# Altium PCB linkit-v4-0.3_6layers_smdonly.PcbDoc (part 5 of 5)
Units mil, origin at the board's own origin, x right, y up, seen from the top; angles counter-clockwise.
Board outline 2755.93 x 1377.98 mil, 6 copper layers (Top Layer, Int1 (GND), Int2 (Sign), Int3 (Sign), Int4 (PWR), Bottom Layer), stack 64.425 mil thick; 199 components, 156 nets, 686 pads, 678 vias.
Unrouted connection lines stored in the file: 1.
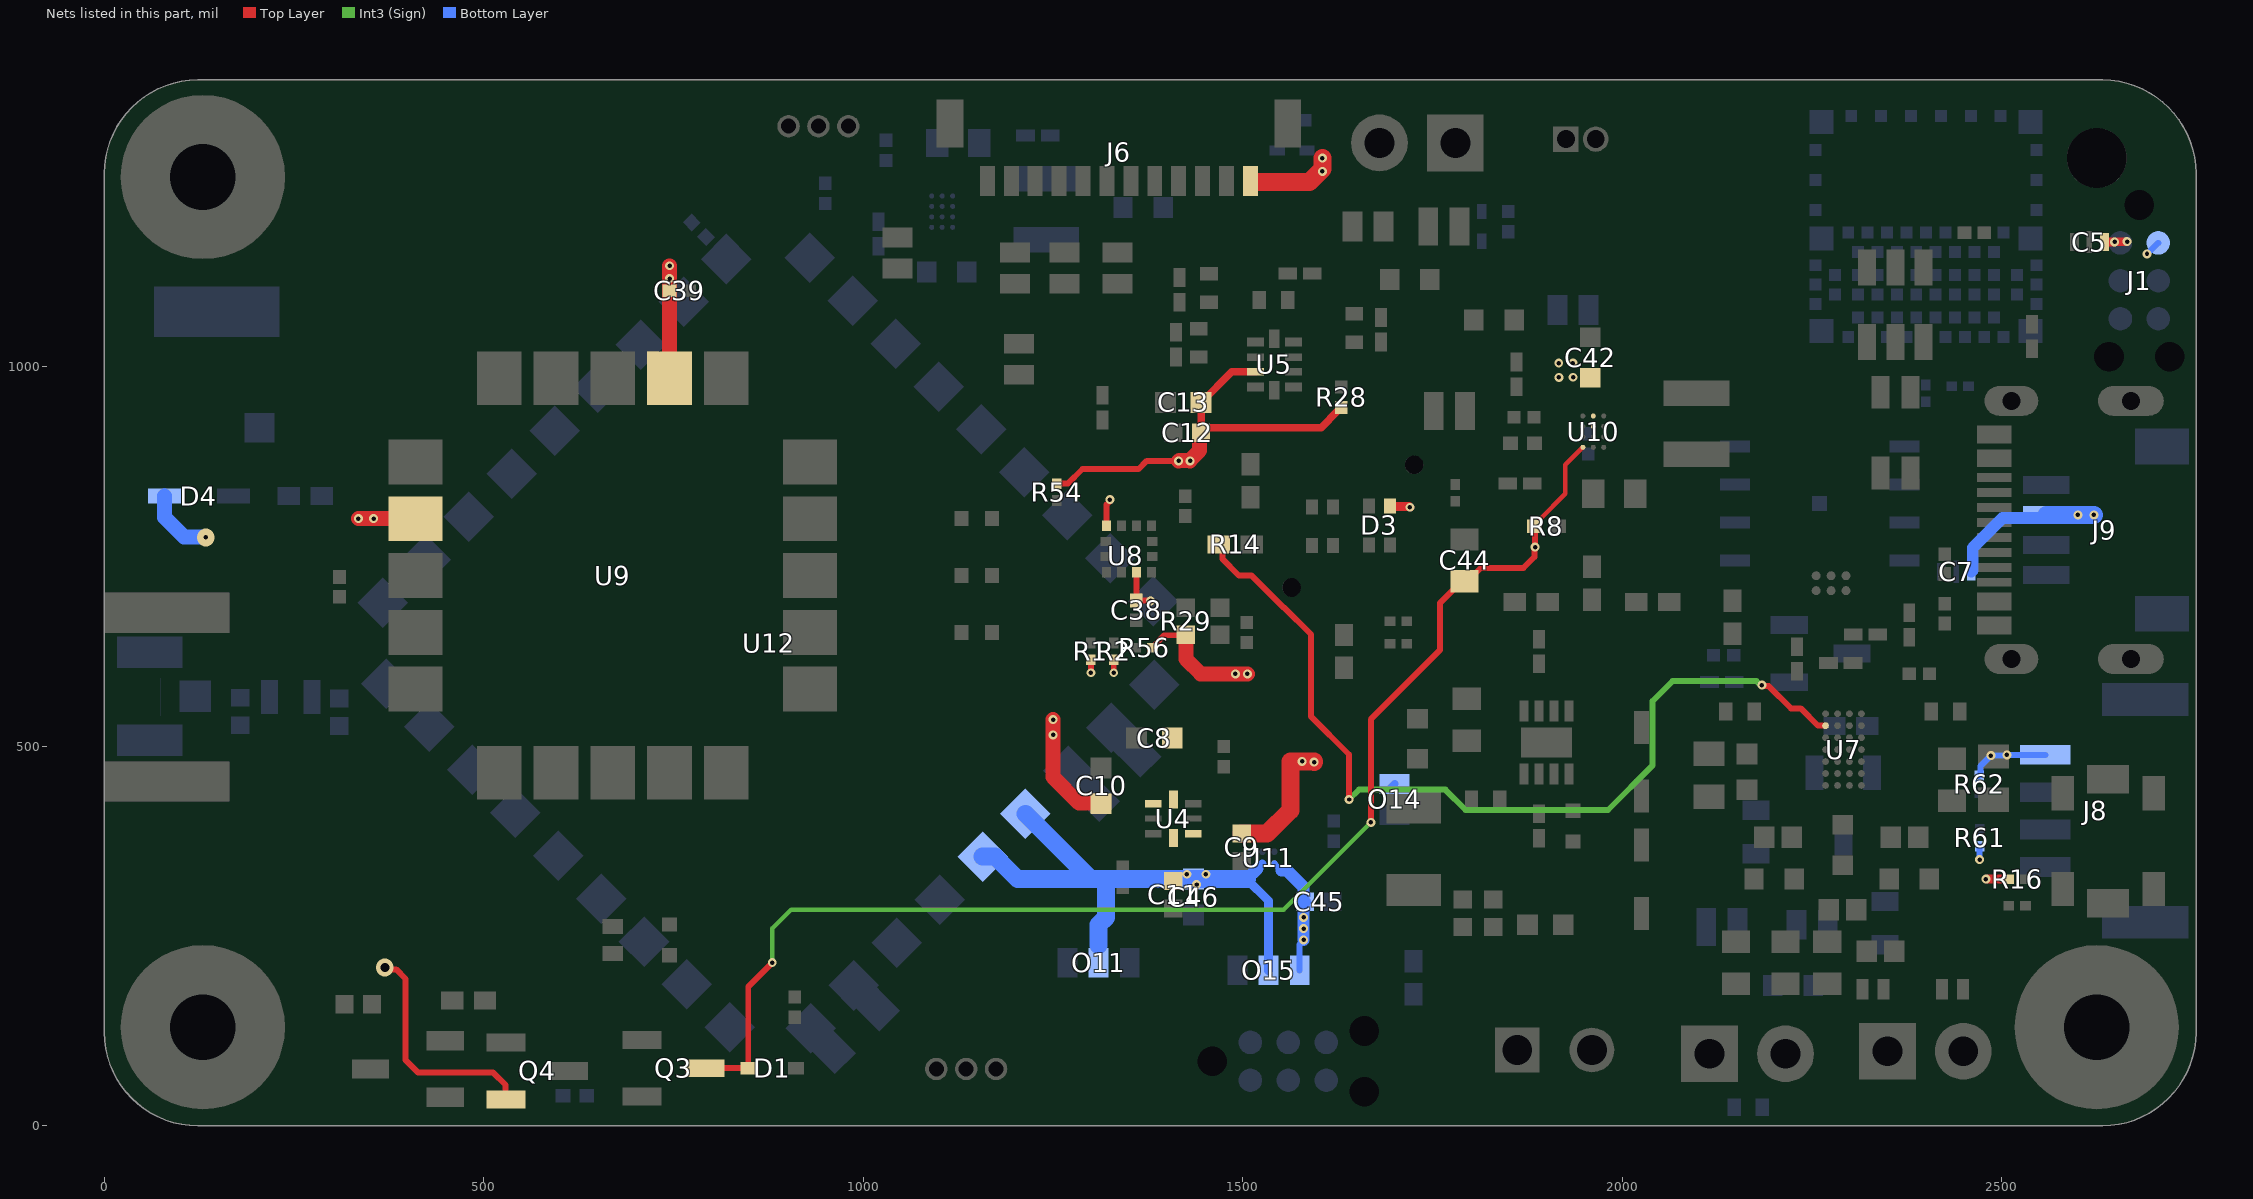
[diagram p8: the nets of this part, all layers, seen from the top]

## Via types
v1: diameter 11.81, hole 5.91, Int1 (GND) to Int3 (Sign), tented both sides, 151 vias
v2: diameter 11.81, hole 5.91, Top Layer to Int1 (GND), tented both sides, 100 vias
v3: diameter 11.81, hole 5.91, Top Layer to Int3 (Sign), tented both sides, 63 vias
v4: diameter 11.81, hole 5.91, Top Layer to Int4 (PWR), tented both sides, 61 vias
v5: diameter 11.81, hole 5.91, Int1 (GND) to Bottom Layer, tented both sides, 58 vias
v6: diameter 11.81, hole 5.91, Int1 (GND) to Int2 (Sign), tented both sides, 38 vias
v7: diameter 15.75/15.75/15.75/15.75 (per signal layer), hole 7.87, Top Layer to Bottom Layer, tented both sides, 28 vias
v8: diameter 11.81, hole 5.91, Top Layer to Int2 (Sign), tented both sides, 18 vias
v9: diameter 11.81, hole 5.91, Int3 (Sign) to Bottom Layer, tented both sides, 17 vias
v10: diameter 11.81, hole 5.91, Int2 (Sign) to Int3 (Sign), tented both sides, 16 vias
v11: diameter 11.81, hole 5.91, Int2 (Sign) to Bottom Layer, tented both sides, 15 vias
v12: diameter 7.87, hole 3.94, Int3 (Sign) to Bottom Layer, tented both sides, 14 vias
v13: diameter 23.62, hole 5.91, Int1 (GND) to Bottom Layer, tented both sides, 13 vias
v14: diameter 19.68, hole 7.87, Top Layer to Bottom Layer, tented both sides, 12 vias
v15: diameter 7.87, hole 3.94, Int2 (Sign) to Bottom Layer, tented both sides, 11 vias
v16: diameter 11.81, hole 5.91, Int4 (PWR) to Bottom Layer, tented both sides, 9 vias
v17: diameter 15.75, hole 7.87, Top Layer to Bottom Layer, tented both sides, 7 vias
v18: diameter 8.9, hole 3.94, Top Layer to Int3 (Sign), tented both sides, 6 vias
v19: diameter 9.84, hole 3.94, Int3 (Sign) to Bottom Layer, tented both sides, 5 vias
v20: diameter 9.84, hole 3.94, Int2 (Sign) to Bottom Layer, tented both sides, 5 vias
v21: diameter 9.84, hole 3.94, Top Layer to Bottom Layer, tented both sides, 5 vias
v22: diameter 11.81, hole 5.91, Bottom Layer to Int4 (PWR), tented both sides, 4 vias
v23: diameter 7.87, hole 3.94, Top Layer to Bottom Layer, tented both sides, 3 vias
v24: diameter 23.62, hole 11.81, Top Layer to Bottom Layer, tented both sides, 3 vias
v25: diameter 23.62, hole 5.91, Top Layer to Int2 (Sign), tented both sides, 2 vias
v26: diameter 23.62, hole 5.91, Int3 (Sign) to Bottom Layer, tented both sides, 2 vias
v27: diameter 11.81, hole 5.91, Top Layer to Bottom Layer, tented both sides, 2 vias
v28: diameter 9.84, hole 3.94, Int1 (GND) to Bottom Layer, tented both sides, 2 vias
v29: diameter 7.87, hole 3.94, Int1 (GND) to Bottom Layer, tented both sides, 2 vias
v30: diameter 15.75, hole 7.87, Int2 (Sign) to Bottom Layer, tented both sides, 1 vias
v31: diameter 15.75, hole 7.87, Top Layer to Int2 (Sign), tented both sides, 1 vias
v32: diameter 6.65, hole 3.94, Int3 (Sign) to Bottom Layer, tented both sides, 1 vias
v33: diameter 23.62, hole 5.91, Bottom Layer to Int4 (PWR), tented both sides, 1 vias
v34: diameter 9.84, hole 3.94, Int2 (Sign) to Int3 (Sign), tented both sides, 1 vias
v35: diameter 6.65, hole 3.94, Top Layer to Int2 (Sign), tented both sides, 1 vias

## Nets (pads, with @x,y where several pads share a name; then routed paths per layer and width w, separated by ;. In a path a pad name is that pad's centre, name@x,y a point inside that pad or via, vN(x,y) a via of type N, cw(c..) or ccw(c..) an arc to the next point about the centre after c; other vN are vias at no path point) (continued)
VSENS_1: C8.1 C12.2 C13.1 R28.1 R29.2 R54.2 R56.2 U4.4 U5.8 | length 731.6
  Top Layer w7.87: R54.2@1255,846.02 1269.47,846.02 1288.86,865.41 1362.9,865.41 1373.51,876.01 v4(1415.58,876.01) ; R56.2@1381.02,630 1381.02,630.96 1396.43,646.37 1424.09,646.37 R29.2@1425,647.28 ; C12.2@1445,912.95 C12.2@1445.08,913.03 ; R28.1@1625.28,941.89 1625.67,941.89 1630,946.22 R28.1@1630,946.61
  Top Layer w9.84: C12.2@1445.08,913.03 C12.2@1445.08,913.11 ; U5.8@1516.58,993.23 1485.28,993.23 C13.1@1445.08,953.03 C12.2@1445.08,913.11 ; R28.1@1625.28,941.89 1603.39,920 1451.97,920 C12.2@1445.08,913.11
  Top Layer w19.68: v4(1415.58,876.01) 1416.33,876.77 v4@1430.36,876.77 ; R29.2@1425.13,647.15 1425.13,614.87 1444.5,595.5 v4(1490.11,595.5) v4(1506.19,595.5) ; v4(1430.67,876.01) 1430.67,876.46 v4@1430.36,876.77 ; C12.2@1445,912.95 1443.11,911.06 1443.11,889.51 v4@1430.36,876.77
VSENS_2: C10.1 C39.1 D4.2 U4.5 U9.2 U9.17 | length 470.4
  Top Layer w19.68: v4(335,800) 409.96,800 U9.2@410.16,799.8 ; U9.17@744.8,984.84 744.8,1100.46 v4(744.79,1133.15) ; v4(1250,535.28) v4(1250,515) 1250,459.58 1284.35,425.24 1312.56,425.24 C10.1@1313.43,424.37
  Bottom Layer w19.68: D4.2@79.65,829.68 79.65,801.59 105.17,776.07 133.07,776.07 v33(133.82,775.32)
  other v4: 355,800 744.79,1116.15
VSYS: C5.1 C7.1 C9.2 C11.2 C38.2 C42.1 C45.2 D3.1 J1.1 J6.1 J8.1 J9.2 O14.1 O15.3 Q4.2 R1.2 R2.2 R16.2 R61.2 R62.1 U4.1 U4.8 U8.3 U8.10 U10.C2 U10.D2 U11.A2 | length 1336.6
  Top Layer w7.87: v24(369.68,208.92) 372.38,206.22 384.64,206.22 397.28,193.58 397.28,86.5 413.24,70.53 512.16,70.53 528.64,54.05 528.64,35.56 Q4.2@529.17,35.04 ; v4(1300,596.98) R1.2@1300,613.98 ; U8.10@1320.47,790.51 1320.47,818.34 1325,822.87 v4(1325,825) ; R2.2@1329.61,613.03 1330,612.64 v4(1330,596.98) ; U8.3@1359.84,729.49 1359.84,692.35 C38.2@1359.71,692.21 1360.06,691.86 1378.26,691.86 v4(1378.61,691.51) ; v4(2648.53,1164.52) v4@2648.77,1164.76 ; v4@2664.76,1164.76 v4(2665,1165)
  Top Layer w9.92: R2.2@1329.61,613.03 1329.61,613.58 R2.2@1330,613.98 ; R16.2@2502.13,325 R16.2@2508.98,325
  Top Layer w11.81: R2.2@1329.61,613.07 R2.2@1330.25,613.72 ; D3.1@1693.78,816.61 1694.59,815.81 1719.19,815.81 v4(1720,815) ; v4@2480.6,325 R16.2@2502.13,325 ; C5.1@2635,1164.41 2635,1164.52 v4(2648.53,1164.52) ; v4@2648.77,1164.76 v4@2664.76,1164.76
  Top Layer w23.62: C9.2@1498.43,385 1531.99,385 1562.62,415.63 1562.62,480.27 v4(1578.23,480.27) 1594.11,480.27 v4(1594.11,479.32) ; J6.1@1511.97,1243.39 1587.95,1243.39 1605,1260.44 v4(1605,1275)
  Bottom Layer w7.87: U11.A2@1541.49,345.47 1541.77,345.47 1550.78,336.46 ; 1558.27,333.65 1558.27,336.46 ; O15.3@1575,205 1575,238.93 1580,243.93 v16(1580,245) ; R62.1@2470,461.02 2471.58,462.61 2471.58,473.78 2486.04,488.23 2506.24,488.23 v16(2506.63,488.63) 2557,488.63 J8.1@2557.18,488.82 ; v16(2470.83,350.94) R61.2@2470.83,368.46 R61.2@2470.83,367.67 ; v16(2691.2,1148.83) 2691.46,1148.83 2705.88,1163.24 J1.1@2706.14,1163.24
  Bottom Layer w9.84: O14.1@1694.75,445.25 O14.1@1700,450.5
  Bottom Layer w15.75: 1550.78,336.46 1558.27,336.46 1580,314.73 1580,296.89 C45.2@1581.89,295 1580,293.11 v16(1580,274.78) v16(1580,260) v16(1580,245) ; C7.1@2459.69,730 2461.65,731.97 2461.65,761.65 2500.75,800.75 2554.61,800.75 J9.2@2558.54,804.69
  Bottom Layer w23.62: J9.2@2558.54,804.69 2600,804.69 v16@2621.23,804.69
  other v4: 1439.28,318.01 2478.83,325 1426.28,331.54 1451.28,331.54 1916.4,986.14 1935.13,986.27 1916.27,1004.87 1935,1005 1605,1257.59
  other v16: 2485.64,487.84 2600,805 2621.23,804.81
VSYS_EN: C44.1 D1.1 Q3.3 R8.1 U10.A3 | length 1749.2
  Top Layer w5.91: R8.1@1884.25,790 1885.24,790 1891.14,795.91 1891.14,798.88 1925,832.74 1925,871.02 U10.A3@1947.95,893.98
  Top Layer w7.87: Q3.3@791.34,75.98 D1.1@848.5,75.98 848.5,183.53 v3(880.12,215.15) ; v3(1668.61,399.78) 1668.61,535.68 1759.67,626.74 1759.67,688.65 1788.46,717.44 1795.95,717.44 1813.5,735 1869.7,735 1884.33,749.62 1884.33,761.85 v8(1885.08,762.6) 1884.67,763.02 1884.67,789.59 R8.1@1884.25,790
  Int3 (Sign) w5.91: v3(880.12,215.15) 880.12,260.12 905,285 1553.83,285 v3(1668.61,399.78)
VSYS_SMD: C46.1 O11.2 O15.2 U11.A1 U12.31 U12.32 | length 734.3
  Bottom Layer w10.79: 1519.33,339.05 U11.A1@1525.75,345.47
  Bottom Layer w11.81: 1505.28,325 1534,296.28 O15.2@1534,205
  Bottom Layer w15.75: 1505.28,325 1519.33,339.05
  Bottom Layer w23.62: U12.31@1157.14,354.67 1173.85,354.67 1203.51,325 1299.95,325 ; U12.32@1213.71,411.23 1299.95,325 ; 1310,237.97 1310,265 1319.72,274.72 1319.72,325 ; 1505.28,325 C46.1@1435,325 1319.72,325 ; 1299.95,325 1319.72,325
WIRELESS_NCHG_LED: R14.1 U7.F4 | length 1205.9
  Top Layer w7.87: R14.1@1468.35,766.02 1472.99,761.38 1472.99,747.01 1495,725 1511.61,725 1553.46,683.15 1554.17,683.15 1590,647.32 1590,539.21 1640,489.21 v3(1640,430) ; v3(2184,580.75) 2185.51,579.25 2192.91,579.25 2222.16,550 2235,550 2257.76,527.24 U7.F4@2267.76,527.24
  Int3 (Sign) w7.87: v3(1640,430) 1653.04,443.04 1766.83,443.04 1793.67,416.2 1981.2,416.2 2040,475 2040,559.8 2066.23,586.03 2176.6,586.03 2181.87,580.75 v3(2184,580.75)
pads on no net: J1.H1 J1.H2 J1.H3 J4.A8 J4.B8 J9.S1 J9.S2 J12.H1 J12.H2 J12.H3 MEC1.1 MEC1.2 MH1.0 Q5.B1 Q5.B2 U2.15 U2.59 U2.65 U2.66 U2.67 U2.68 U2.69 U2.70 U2.71 U2.72 U2.73 U2.74 U2.75 U2.76 U2.77 U2.78 U8. U8.4 U8.11 U12.11 U12.12

## Polygon pours and split planes (outlines as drawn)
GND on Bottom Layer (solid, pour order 7): 379.52,634.46 386.1,630.07 419.51,596.66 423.9,590.08 425.44,582.32 423.9,574.56 419.51,567.99 386.1,534.58 379.52,530.18 371.85,528.66 370.2,527.97 368.06,527.09 364.72,526.42 361.37,525.76 359.38,525.76 357.42,525.37 295.67,525.37 293.07,523.63 285.31,522.09 262.87,522.09 255.12,523.63 248.54,528.03 244.14,534.6 242.6,542.36 242.6,587.64 244.14,595.4 248.54,601.97 255.12,606.37 262.87,607.91 285.31,607.91 293.07,606.37 299.65,601.97 300.4,600.85 328.21,600.85 357.43,630.07 364,634.46 371.76,636
GND on Bottom Layer (solid, pour order 8): 236.77,606.37 243.35,601.97 247.75,595.4 249.29,587.64 249.29,542.36 247.75,534.6 243.35,528.03 236.77,523.63 229.01,522.09 206.57,522.09 198.82,523.63 192.62,527.77 170.27,527.77 168.68,526.71 160.92,525.17 141.14,525.17 140.71,525.08 99.37,525.08 91.61,526.62 85.03,531.02 80.64,537.6 79.1,545.35 79.1,586.69 80.64,594.45 85.03,601.03 91.61,605.42 99.37,606.97 135.55,606.97 135.72,607 160.92,607 168.68,605.46 171.98,603.25 194.15,603.25 198.82,606.37 206.57,607.91 229.01,607.91
GND on Bottom Layer "BOTGND" (solid, remove dead copper, pour order 4): 0,1303.68 0,70 75,-5 2675,-5 2760,75 2755.91,1308.03 2700,1372.98 57.23,1372.98
GND on Top Layer "TOPGND" (solid, remove dead copper, pour order 0): 0,79.99 65,0 2682.78,0 2755.92,73.14 2755.92,1304.79 2680.35,1380.35 59.28,1377.96 0,1310
GND on Int2 (Sign) "L2_GND" (solid, remove dead copper, pour order 2): 0.02,1299.57 -4.23,75.77 71.52,0.01 2680,0 2755.92,83.18 2755.92,1312.28 2690,1380 67.85,1377.98
GND on Int3 (Sign) "L3_GND" (solid, remove dead copper, pour order 3): -0.01,1303.08 0,65.17 74.11,0.01 2680,0 2755.91,80 2755.91,1306.73 2696.32,1377.98 69.55,1377.96
VBUS on Int4 (PWR) (split plane): 2557.06,926.71 2557.06,833.29 2364.97,641.2 2266.71,542.94 2238.29,542.94 2132.94,648.29 2132.94,745.97 2338.82,745.97 2340.87,746.24 2342.79,747.03 2344.43,748.29 2528.2,932.06 2551.71,932.06
VSENS_1 on Int4 (PWR) (split plane): 1492.06,851.71 1492.06,727.5 1492.06,646.38 1492.33,644.32 1493.12,642.41 1494.38,640.76 1522.06,613.09 1522.06,573.29 1501.71,552.94 1498.29,552.94 1442.94,608.29 1442.94,672.5 1442.67,674.56 1441.88,676.47 1440.62,678.12 1398.58,720.15 1398.58,902.06 1441.71,902.06
no net on Int4 (PWR) (split plane): 1393.12,1186.03 1394.38,1184.38 1666.88,911.88 1667.06,911.75 1667.06,558.29 1626.71,517.94 1543.29,517.94 1516.23,545 1535.62,564.38 1536.88,566.03 1537.67,567.94 1537.94,570 1537.94,616.38 1537.67,618.43 1536.88,620.35 1535.62,621.99 1507.94,649.67 1507.94,727.5 1507.94,855 1507.67,857.06 1506.88,858.97 1505.62,860.62 1450.62,915.62 1448.97,916.88 1447.06,917.67 1445,917.94 1398.58,917.94 1398.58,964.36 1398.31,966.42 1397.75,967.77 1397.52,968.33 1396.26,969.98 1270.62,1095.62 1268.97,1096.88 1267.06,1097.67 1265,1097.94 1063.29,1097.94 1032.94,1128.29 1032.94,1171.71 1048.29,1187.06 1392.7,1187.06
VBAT on Int4 (PWR) (split plane): 1721.53,1027.24 1723.18,1025.98 1725.09,1025.18 1727.15,1024.91 1808.86,1024.91 1947.06,886.71 1947.06,855 1947.06,852.95 1947.33,850.89 1948.12,848.98 1949.38,847.33 1995.36,801.36 1995.36,606.59 1899.38,510.62 1898.12,508.97 1897.33,507.06 1897.06,505 1897.06,440 1897.33,437.94 1898.12,436.03 1899.38,434.38 1929.38,404.38 1931.03,403.12 1932.94,402.33 1935,402.06 2250,402.06 2252.06,402.33 2253.97,403.12 2255.62,404.38 2298.29,447.06 2382.06,447.06 2382.06,430 2382.06,373.29 2293.62,284.85 1956.91,284.85 1954.85,284.58 1952.94,283.79 1951.29,282.52 1804.38,135.62 1803.12,133.97 1802.33,132.06 1802.06,130 1802.06,20.1 272.94,20.11 272.94,106.71 293.8,127.57 381.35,127.57 383.4,127.84 385.32,128.64 386.96,129.9 469.12,212.06 1225,212.06 1227.06,212.33 1228.97,213.12 1229.15,213.26 1596.2,213.26 1598.25,213.53 1600.17,214.32 1601.81,215.58 1815.62,429.38 1816.88,431.03 1817.67,432.94 1817.94,435 1817.94,546.71 1875.62,604.38 1893.17,621.93 1894.43,623.58 1895.22,625.5 1895.49,627.55 1895.49,682.45 1895.22,684.5 1894.43,686.42 1893.17,688.07 1891.72,689.17 1890.62,690.62 1792.94,788.29 1792.94,875 1792.67,877.06 1791.88,878.97 1790.62,880.62 1745.62,925.62 1743.97,926.88 1742.06,927.67 1740,927.94 1675,927.94 1673.49,927.74 1407.94,1193.29 1407.94,1216.71 1423.29,1232.06 1516.71,1232.06
VSENS_2 on Int4 (PWR) (split plane): 1274.92,683.85 1274.92,511.15 1266.71,502.94 1223.29,502.94 1187.94,538.29 1187.94,631.16 1187.67,633.22 1186.88,635.14 1185.62,636.78 741.78,1080.62 740.14,1081.88 738.22,1082.67 736.16,1082.94 705,1082.94 702.94,1082.67 701.03,1081.88 699.38,1080.62 409.38,790.62 392.81,774.04 369.31,774.04 367.26,773.77 365.34,772.97 363.7,771.71 349.93,757.94 20.09,757.94 20.09,848.86 28.29,857.06 350,857.06 352.06,857.33 353.97,858.12 355.62,859.38 668.29,1172.06 786.71,1172.06
VSYS on Int4 (PWR) (split plane): 278 vertices, not listed, extent 20.06,20.06 2735.86,1357.91
VBUS on Int1 (GND) (split plane): 2367.32,1184.83 2367.05,1182.78 2367.05,1163.58 2367.32,1161.53 2368.11,1159.61 2369.38,1157.97 2377.06,1150.29 2377.06,1120 2377.06,1019.56 2377.33,1017.5 2378.12,1015.59 2379.38,1013.94 2469.42,923.9 2471.07,922.64 2472.98,921.85 2475.04,921.58 2549.33,921.58 2561.14,909.77 2561.14,859.89 2493.34,859.89 2327.94,1025.29 2327.94,1166.25 2327.67,1168.31 2326.88,1170.22 2325.62,1171.87 2324.01,1173.09 2324.01,1185 2367.39,1185
AGND on Int1 (GND) (split plane): 1685.59,1143.18 1685.59,1096.82 1621.71,1032.94 1443.29,1032.94 1435.62,1040.62 1407.94,1068.29 1407.94,1136.71 1433.29,1162.06 1666.71,1162.06
PGND1 on Int1 (GND) (split plane): 1909.38,1074.38 1911.03,1073.12 1912.94,1072.33 1915,1072.06 2011.71,1072.06 2052.06,1031.71 2052.06,813.29 2031.71,792.94 1863.29,792.94 1812.94,843.29 1812.94,1051.71 1858.29,1097.06 1886.71,1097.06
PGND1 on Int1 (GND) (split plane): 1262.06,1357.87 1262.06,1288.29 1219.9,1246.13 1218.63,1244.48 1217.84,1242.57 1217.57,1240.51 1217.57,1118.8 1176.71,1077.94 1028.29,1077.94 977.94,1128.29 977.94,1170 977.94,1206.71 1129.1,1357.87
GND on Int1 (GND) (split plane): 123.04,1357.87 1106.64,1357.87 964.38,1215.62 963.12,1213.97 962.33,1212.06 962.06,1210 962.06,1170 962.06,1125 962.33,1122.94 963.12,1121.03 964.38,1119.38 1019.38,1064.38 1021.03,1063.12 1022.94,1062.33 1025,1062.06 1180,1062.06 1182.06,1062.33 1183.97,1063.12 1185.62,1064.38 1231.13,1109.9 1232.39,1111.54 1233.18,1113.46 1233.45,1115.51 1233.45,1237.22 1275.62,1279.38 1276.88,1281.03 1277.67,1282.94 1277.94,1285 1277.94,1357.87 2045,1357.87 2045,1185 2315.99,1185 2315.99,1173.09 2314.38,1171.87 2313.12,1170.22 2312.33,1168.31 2312.06,1166.25 2312.06,1022 2312.33,1019.94 2313.12,1018.03 2314.38,1016.38 2484.44,846.33 2486.08,845.07 2488,844.27 2490.05,844 2569.08,844 2571.13,844.27 2573.05,845.07 2574.69,846.33 2575.96,847.97 2576.75,849.89 2577.02,851.95 2577.02,913.06 2576.75,915.12 2575.96,917.03 2574.69,918.68 2558.24,935.14 2556.59,936.4 2554.67,937.19 2552.62,937.46 2478.33,937.46 2392.94,1022.85 2392.94,1120 2392.94,1153.58 2392.67,1155.63 2391.88,1157.55 2390.62,1159.19 2382.93,1166.87 2382.93,1182.78 2382.67,1184.78 2382.89,1185 2735.81,1185 2735.81,123.04 2735.86,122.56 2735.52,114.96 2734.34,105.96 2732.38,97.1 2729.65,88.45 2726.17,80.06 2721.98,72.01 2717.11,64.36 2711.58,57.16 2705.45,50.47 2698.76,44.34 2691.56,38.81 2683.91,33.93 2675.85,29.74 2667.47,26.27 2658.81,23.54 2649.95,21.58 2640.96,20.39 2633.27,20.06 2632.87,20.1 123.04,20.11 122.64,20.07 114.96,20.4 105.96,21.59 97.1,23.55 88.45,26.28 80.06,29.76 72.01,33.95 64.36,38.82 57.16,44.35 50.47,50.48 44.34,57.17 38.81,64.37 33.93,72.02 29.74,80.07 26.27,88.46 23.54,97.11 21.58,105.97 20.39,114.97 20.06,122.66 20.1,123.05 20.1,129.94 20.09,130.06 20.1,1254.93 20.06,1255.33 20.39,1263.02 21.58,1272.01 23.54,1280.87 26.27,1289.53 29.75,1297.91 33.94,1305.96 38.81,1313.62 44.34,1320.82 50.47,1327.51 57.16,1333.64 64.36,1339.17 72.01,1344.04 80.06,1348.23 88.45,1351.71 97.1,1354.43 105.96,1356.4 114.96,1357.58 122.56,1357.91

## Other copper
Top Layer:
  rectangle net VSYS: 1418.72,310.95 1460.83,337.96
  rectangle net VBUS: 2143.21,709.11 2172.8,736.34
  region net VSYS: 1408.37,381.15 1408.37,375.26 1414.3,369.33 1414.3,342.47 1420.19,336.58 1420.19,320.07 1396.63,320.07 1396.63,336.93 1402.48,342.78 1402.48,381.46
  region net VSENS_1: 1408.57,428.35 1408.57,434.24 1402.64,440.17 1402.64,467.04 1393.49,476.19 1393.49,505 1405.69,505 1419.64,503.78 1420.65,497.92 1420.65,472.91 1414.46,466.72 1414.29,428.07
  region net VSENS_2: 1381.85,424.37 1371.54,434.68 1353.43,434.68 1349.99,438.12 1315.71,438.12 1315.71,421.26 1326.37,410.6 1344.35,410.6 1354.53,420.79 1376.27,420.79
  region net VSYS: 1435.26,385.02 1440.18,380.1 1458.3,380.1 1465.14,373.26 1501.4,373.26 1501.4,388.13 1492.77,396.76 1464.45,396.76 1457.61,389.93 1442.91,389.93
  pour cut-out: 1845,975 1844.41,974.41 1844.41,926.85 1956.65,926.85 1954.92,975
  pour cut-out: 2305.14,743.11 2244.07,743.11 2244.07,687.58 2304.36,687.58
  pour cut-out: 2352.72,552.72 2353.57,551.86 2353.57,459.43 2235,459.43 2235,551.86
  region net NetC58_1: 1829.46,442.39 1866.99,476.99 1873.03,476.99 1875.33,450.51 1846.68,417.03 1828.92,417.03
  pour cut-out: 2148.9,940.75 2060.52,940.75 2060.52,914.64 2065.91,909.25 2148.9,909.25
  region net VSYS: 1965.01,921.25 1964.99,937.05 1965.01,952.95 1971.42,959.36 1971.42,995.68 1940.34,1008.79 1938.08,1011.05 1909.39,1011.05 1909.39,1002.29 1909.39,993.5 1909.39,981.82 1931.09,975.9 1935.72,974.56 1947.06,964.62 1958.5,953.18 1958.5,921.25
  region net PGND4: 1880.99,524.61 1880.93,524.66 1815.8,524.66 1809.86,518.72 1811.92,516.65 1811.92,493.95 1812.13,493.95 1820.61,485.47 1878.9,485.47
  region net NetC2_2: 1870,535 1857.04,547.96 1802.86,547.96 1802.86,557.86 1807.45,575.11 1865.67,575.11 1875.22,565.56 1875.22,539.74
  region net NetC23_1: 2264.32,460.72 2282.99,460.69 2283.5,468.36 2266.93,468.36 2238.36,468.36 2220,450 2220,305 2258.92,271.72 2275,275 2264.32,294.07 2245,310 2245,440 2248.46,450.46 2257.13,459.13
  region net GND: 2281.01,545.53 2286.95,551.48 2286.95,577.64 2289.31,580 2318.01,580 2318.01,565.25 2302.59,549.83 2301.17,544.56 2299.29,541.39 2299.29,542.99 2291.5,546.93 2284.4,542.79
  region net VBAT: 1787.47,957.42 1780.01,966.54 1780.01,1000 1817.4,1000 1817.4,969.5 1805.33,957.42
  region net "LX2_TPS63901 3V3&2V31": 1975.52,938.44 1995.2,951.89 2035,965 2054.95,981.46 2064.84,981.46 2070.57,952.79 2017.53,934.14 2000.3,933.35 1975.51,932.2
  pour cut-out: 2045,1185 2045,1390 2750,1390 2750,1190 2755,1185
  region net COIL-2: 2317.6,460.75 2299.39,460.98 2299.06,468.6 2315.82,468.6 2344.39,468.6 2362.75,450.25 2362.75,305.25 2318.69,271.65 2307.75,275.25 2315.82,295.29 2337.75,310.25 2337.75,440.25 2334.29,450.71 2325.63,459.38
  region net "LX1_TPS63901 3V3&2V31": 1975.47,891.03 1994.42,878.3 2037.03,873.64 2055.17,868.83 2067,869.48 2071.64,901.19 2046.46,901.33 2018.85,898.73 2010.06,897.27 1984.12,897.27 1975.46,897.27
  region net VBAT: 1958.56,894.1 1958.45,893.99 1958.45,876.29 1947.01,864.84 1947.01,736.65 1976.47,736.65 1976.47,864.69 1965.03,876.13 1965.03,893.88
  region net VBUS: 2264.28,542.33 2246.69,559.92 2246.69,582.35 2276.51,582.35 2276.51,554.14 2271.42,549.04 2271.42,542.05
  region net VBUS: 2305.38,734.68 2295.74,734.68 2290,728.56 2289.06,724.15 2289.12,724.15 2292.96,719.2 2301.29,715.25 2304.59,715.06
  region net RX-OUT: 2315.14,491.98 2315.02,491.86 2207.18,491.86 2191.79,476.47 2153.68,476.47 2153.68,479.61 2177.74,503.67 2236.33,503.67 2240.37,499.63 2315.32,499.63 2315,499.31 2315,495.75
  region net PGND3: 2271.85,450.43 2318.55,450.43 2318.55,396.38 2301.53,379.36 2281.53,379.36 2264.19,396.7 2264.19,447.4
Int2 (Sign):
  pour cut-out: -0.5,603.72 0.12,603.1 105.1,603.1 113.35,594.85 113.5,595 165,595 165,593.99 168.14,590.85 200.85,590.85 205.65,595.65 293.14,595.65 293.14,588.89 293.83,588.2 333.5,588.2 371.71,626.41 416.28,581.84 416.28,581.44 414.91,581.44 372.2,538.73 370.34,540.59 367.3,540.59 364.75,538.05 291.08,538.05 287.46,534.42 287.26,534.62 197.63,534.62 192.04,540.2 190.18,538.34 0.03,538.34
  pour cut-out: 2045,1185 2045,1390 2750,1390 2750,1190 2755,1185
Int3 (Sign):
  pour cut-out: -1.07,603.61 -0.45,602.99 104.53,602.99 112.78,594.74 112.93,594.89 164.43,594.89 164.43,593.88 167.57,590.74 200.28,590.74 205.08,595.54 292.57,595.54 292.57,588.78 293.25,588.09 332.93,588.09 371.14,626.3 415.71,581.73 415.71,581.33 414.34,581.33 371.63,538.62 369.77,540.48 366.73,540.48 364.18,537.94 290.51,537.94 286.89,534.31 286.69,534.51 197.05,534.51 191.47,540.09 189.61,538.23 -0.54,538.23
  region net NetC23_1: 2159.84,268.32 2145.74,254.22 2088.74,312.64 2107.02,321.6
  pour cut-out: 2045,1185 2045,1390 2750,1390 2750,1190 2755,1185
Bottom Layer:
  rectangle net NetC49_2: 135.72,545.44 160.92,586.73
  pour cut-out: 255,595.51 254.95,595.46 229.01,595.46 229.01,534.54 229.06,534.49 255,534.49
  pour cut-out: 232.01,594.87 234.55,593.17 236.24,590.63 236.84,587.64 236.84,542.36 236.24,539.37 234.55,536.83 232.01,535.13 229.01,534.54 206.57,534.54 203.58,535.13 201.04,536.83 199.35,539.37 199.18,540.22 166.66,540.22 166.45,539.91 163.92,538.21 160.92,537.62 141.14,537.62 140.71,537.53 99.37,537.53 96.38,538.13 93.84,539.82 92.14,542.36 91.55,545.35 91.55,586.69 92.14,589.69 93.84,592.23 96.38,593.92 99.37,594.52 135.55,594.52 135.72,594.55 160.92,594.55 163.92,593.96 166.45,592.26 167.43,590.8 199.46,590.8 201.04,593.17 203.58,594.87 206.57,595.46 229.01,595.46
  pour cut-out: 374.76,622.96 377.3,621.26 410.7,587.86 412.4,585.32 412.99,582.32 412.4,579.33 410.7,576.79 377.3,543.38 374.76,541.69 371.76,541.09 369.93,541.46 368.45,540.47 365.63,539.3 358.94,537.97 358.17,537.97 357.42,537.82 291.51,537.82 290.85,536.83 288.31,535.13 285.31,534.54 262.87,534.54 259.88,535.13 257.34,536.83 255.65,539.37 255.05,542.36 255.05,587.64 255.65,590.63 257.34,593.17 259.88,594.87 262.87,595.46 285.31,595.46 288.31,594.87 290.85,593.17 292.54,590.63 292.99,588.4 333.37,588.4 366.23,621.26 368.77,622.96 371.76,623.55
  region net "LX1_TPS63901 3V3&2V32": 1117.61,1222.04 1121.64,1222.85 1206.05,1232.15 1206.05,1257.66 1199.29,1264.42 1192.42,1264.42 1173.48,1252.98 1136.42,1248.02 1115.4,1226.99
  region net "LX2_TPS63901 3V3&2V32": 1118.88,1186.28 1122.91,1185.46 1200.56,1183.87 1199.42,1150.45 1181.81,1150.59 1165.97,1157.88 1138.87,1162.15 1116.67,1181.32
  region net "VOUT_TPS63901 3V3&2V32": 995,1085 1001.83,1085 1006.63,1089.81 1068.16,1089.81 1095.92,1117.57 1095.92,1147.33 1106.5,1159.64 1107.26,1183.85 1107.18,1197.93 1100.78,1197.93 1100.49,1183.61 1099.83,1178.01 1094.7,1172.3 1042.48,1122.56 978.24,1122.56 972.56,1116.87
  region net "VOUT_TPS63901 3V3&2V32": 915,1150 975,1090 990,1105 935,1160 925,1160
  region net VBAT: 1101.75,1223.72 1098.58,1230.55 1098,1232.57 1095,1240 1093.49,1243.19 1093.49,1256.41 1083.07,1266.82 1083.07,1278.74 1110.79,1278.74 1112.3,1277.23 1112.3,1241.68 1107.47,1231.8 1107.15,1225.31
  pour cut-out: 264.06,534.49 245.94,534.49 245.94,595.51 264.06,595.51
  pour cut-out: 100,605 100,525 20,525 20,605
  pour cut-out: 2045,1185 2045,1390 2750,1390 2750,1190 2755,1185
  pour cut-out: 2262.2,1042.2 2542.79,1042.2 2542.79,1164.24 2537.79,1169.24 2262.2,1169.24
Int1 (GND) (plane layer: these items are gaps in the copper):
  pour cut-out: 2045,1185 2045,1390 2750,1390 2750,1190 2755,1185
  lines w7.87: 2320,1166.25 2320,1200 2325,1205 2335,1205 2385,1205 2385,1192.79 2374.99,1182.78
  lines w15.75: 2320,1166.25 2320,1022 2490.05,851.95 2569.08,851.95 2569.08,913.06 2552.62,929.52 2475.04,929.52 2385,1019.56 2385,1120 2385,1153.58 2374.99,1163.58 2374.99,1182.78 ; 970,1125 1025,1070 1180,1070 1225.51,1115.51 1225.51,1240.51 1270,1285 1270,1375 1135,1375 970,1210 970,1170 970,1125 ; 1400,1065 1430,1035 1440,1025 1625,1025 1693.53,1093.53 1693.53,1146.47 1670,1170 1430,1170 1400,1140 1400,1065 ; 1805,840 1860,785 2035,785 2060,810 2060,1035 2015,1080 1915,1080 1890,1105 1855,1105 1805,1055 1805,840
Int4 (PWR) (plane layer: these items are gaps in the copper):
  region: 2299.37,879.06 2220.63,879.06 2220.63,760.94 2299.37,760.94
  region: 2255,1200 2255,966.76 2560,966.76 2560,1020 2560,1195
  pour cut-out: 2045,1185 2045,1390 2750,1390 2750,1190 2755,1185
  pour cut-out: -15,644.9 469.14,645.1 469.14,575.86 469.14,525.86 469.14,505 469.14,495 469.14,485 -15,485
  lines w15.75: 245,0 265,0 265,110 290.51,135.51 381.35,135.51 465.83,220 1225,220 ; 1226.2,221.2 1418.7,221.2 1531.32,221.2 1596.2,221.2 1810,435 1810,550 1870,610 1887.55,627.55 1887.55,682.45 ; 1395,1195 1045,1195 1025,1175 1025,1125 1060,1090 1065,1090 1205.64,1090 1265,1090 1390.64,964.36 1390.64,910 ; 1672.5,917.5 1400,1190 1400,1220 1420,1240 1520,1240 1727.15,1032.85 1812.15,1032.85 1955,890 ; 1810,-2.5 1810,130 1956.91,276.91 2296.91,276.91 2390,370 2390,430 2390,455 2295,455 2250,410 2045,410 1935,410 1905,440 1905,505 2003.3,603.3 2003.3,804.65 1955,852.95 ; 1885,685 1785,785 1785,875 1740,920 1675,920 1675,555 1630,510 1540,510 1505,545 ; 1390.64,910 1410,910 1445,910 1500,855 1500,727.5 1500,646.38 1530,616.38 1530,570 1505,545 ; 1390.64,910 1390.64,716.86 1435,672.5 1435,605 1495,545 1505,545 ; 1955,852.95 1955,855 1955,890 ; 1955,852.95 1955,890 ; 10,750 353.22,750 369.31,766.1 396.1,766.1 415,785 705,1075 736.16,1075 1180,631.16 1180,535 1220,495 1270,495 1282.86,507.86 1282.86,687.14 790,1180 665,1180 350,865 80,865 25,865 10,850 10,750 ; 2125,645 2125,753.91 2338.82,753.91 2524.91,940 2555,940 2565,930 2565,830 2370.58,635.58 2270,535 2235,535 2125,645

## Silkscreen, mask and mechanical layers (free items; w line width, h text height)
Top Overlay:
  drawing of 108 lines, arcs and shapes, not listed
  text "-" at 1690,1380.74 h31.5 r180
  text "+" at 1800,1375.25 h31.5 r180
  text "1" at 1545.91,1185.91 h39.37
  text "Argos Linkit V4.0 (SMD)" at 235,295 h78.74
  text "Reed switch" at 315,190 h39.37
  text "UART GPS" at 949.72,129.72 h31.5
  text "+" at 2011.28,83.05 h39.37
  text "+" at 2330.84,0.65 h39.37
  text "-" at 2204.99,-3.4 h31.5
  text "-" at 2438.71,-4.36 h31.5
Bottom Overlay:
  circle w10: c1495,650 r4.52
  lines w5.91: 2045.67,1357.71 2045.67,1184.81 2233.5,1184.81 ; 2566.5,1184.81 2649.91,1184.81 ; 2662.37,1184.81 2699.91,1184.81 ; 2712.37,1184.81 2752.95,1184.81
  text "SAT UART" at 865.28,1279.72 h31.5
  text "+" at 1840,5 h60
  text "-" at 1945,0.01 h60
Bottom Paste:
  rectangle: 133.85,545.36 162.42,586.69
Mechanical 3:
  drawing of 366 lines, arcs and shapes, not listed
  text "Layer" at 158.88,4030 h60
  text "Name" at 409.63,4030 h60
  text "Material" at 1048.78,4030 h60
  text "Thickness" at 1521.1,4030 h60
  text "Constant" at 1878.87,4030 h60
  text "Board Layer Stack" at 2210.14,4030 h60
  text "Top Overlay" at 409.63,3910 h60
  text "Top Solder" at 409.63,3790 h60
  text "SM-003" at 1048.78,3790 h60
  text "0.025mm" at 1521.1,3790 h60
  text "4" at 1878.87,3790 h60
  text "Top Surface Finish" at 409.63,3670 h60
  text "Nickel, Gold" at 1048.78,3670 h60
  text "0.004mm" at 1521.1,3670 h60
  text "1" at 158.88,3550 h60
  text "Top Layer" at 409.63,3550 h60
  text "CF-004" at 1048.78,3550 h60
  text "0.035mm" at 1521.1,3550 h60
  text "Dielectric 1" at 409.63,3430 h60
  text "S1000-2MB" at 1048.78,3430 h60
  text "0.050mm" at 1521.1,3430 h60
  text "4.25" at 1878.87,3430 h60
  text "Dielectric 2" at 409.63,3310 h60
  text "S1000-2MB" at 1048.78,3310 h60
  text "0.050mm" at 1521.1,3310 h60
  text "4.25" at 1878.87,3310 h60
  text "2" at 158.83,3190 h60
  text "Int1 (GND)" at 409.63,3190 h60
  text "CF-004" at 1048.78,3190 h60
  text "0.018mm" at 1521.1,3190 h60
  text "Dielectric 3" at 409.63,3070 h60
  text "S1000-2MB" at 1048.78,3070 h60
  text "0.050mm" at 1521.1,3070 h60
  text "4.25" at 1878.87,3070 h60
  text "Dielectric 4" at 409.63,2950 h60
  text "S1000-2MB" at 1048.78,2950 h60
  text "0.050mm" at 1521.1,2950 h60
  text "4.25" at 1878.87,2950 h60
  text "3" at 158.88,2830 h60
  text "Int2 (Sign)" at 409.63,2830 h60
  text "CF-004" at 1048.78,2830 h60
  text "0.035mm" at 1521.1,2830 h60
  text "Dielectric 5" at 409.63,2710 h60
  text "Core-001-HCC" at 1048.78,2710 h60
  text "1.065mm" at 1521.1,2710 h60
  text "4.25" at 1878.87,2710 h60
  text "4" at 158.88,2590 h60
  text "Int3 (Sign)" at 409.63,2590 h60
  text "CF-004" at 1048.78,2590 h60
  text "0.035mm" at 1521.1,2590 h60
  text "Dielectric 6" at 409.63,2470 h60
  text "S1000-2MB" at 1048.78,2470 h60
  text "0.050mm" at 1521.1,2470 h60
  text "4.25" at 1878.87,2470 h60
  text "Dielectric 7" at 409.63,2350 h60
  text "S1000-2MB" at 1048.78,2350 h60
  text "0.050mm" at 1521.1,2350 h60
  text "4.25" at 1878.87,2350 h60
  text "5" at 158.88,2230 h60
  text "Int4 (PWR)" at 409.63,2230 h60
  text "CF-004" at 1048.78,2230 h60
  text "0.018mm" at 1521.1,2230 h60
  text "Dielectric 8" at 409.63,2110 h60
  text "S1000-2MB" at 1048.78,2110 h60
  text "0.050mm" at 1521.1,2110 h60
  text "4.25" at 1878.87,2110 h60
  text "Dielectric 9" at 409.63,1990 h60
  text "S1000-2MB" at 1048.78,1990 h60
  text "0.050mm" at 1521.1,1990 h60
  text "4.25" at 1878.87,1990 h60
  text "6" at 158.88,1870 h60
  text "Bottom Layer" at 409.63,1870 h60
  text "CF-004" at 1048.78,1870 h60
  text "0.035mm" at 1521.1,1870 h60
  text "Bottom Surface Finish" at 409.63,1750 h60
  text "Nickel, Gold" at 1048.78,1750 h60
  text "0.004mm" at 1521.1,1750 h60
  text "Bottom Solder" at 409.63,1630 h60
  text "SM-003" at 1048.78,1630 h60
  text "0.025mm" at 1521.1,1630 h60
  text "4" at 1878.87,1630 h60
  text "Bottom Overlay" at 409.63,1510 h60
Mechanical 8:
  lines w10: 190,-30 1587.64,-30 1587.64,1367.64 190,1367.64 190,-30
Mechanical 12:
  lines w3.94: 0,129.94 0,123.05 ccw(c124.03,124.04) 123.04,0.01 2632.87,0 ccw(c2631.89,124.03) 2755.92,123.04 2755.91,252.96 2755.91,1254.93 ccw(c2631.89,1253.95) 2632.87,1377.98 ; -0.01,130.01 0,1254.93 cw(c124.03,1253.95) 123.04,1377.98 ; 123.04,1377.96 2632.87,1377.96
Drill Drawing:
  drawing of 158 lines, arcs and shapes, not listed
  text "Symbol" at 3275.47,3505.37 h72
  text "Count" at 3516.46,3505.37 h72
  text "Hole Size" at 3726.07,3505.37 h72
  text "Plated" at 4180.92,3505.37 h72
  text "Hole Type" at 4394.23,3505.37 h72
  text "Drill Layer Pair" at 4698.82,3505.37 h72
  text "Via/Pad" at 5263.19,3505.37 h72
  text "Pad Shape" at 5515,3505.37 h72
  text "Template" at 5839.9,3505.37 h72
  text "Description" at 6464.88,3505.37 h72
  text "Hole Tolerance (+)" at 6791.41,3505.37 h72
  text "Hole Tolerance (-)" at 7290.61,3505.37 h72
  text "Hole Length" at 7776.71,3505.37 h72
  text "Routed Path Length" at 8228.24,3505.37 h72
  text "1" at 3516.46,3383 h60
  text "2.000mm (78.74mil)" at 3726.07,3383 h60
  text "NPTH" at 4180.92,3383 h60
  text "Round" at 4394.23,3383 h60
  text "Top Layer - Bottom Layer" at 4698.82,3383 h60
  text "Pad" at 5263.19,3383 h60
  text "Rounded" at 5515,3383 h60
  text "c200hn200m200" at 5839.9,3383 h60
  text "-" at 7776.71,3383 h60
  text "-" at 8228.24,3383 h60
  text "2" at 3516.46,3260.64 h60
  text "0.150mm (5.91mil)" at 3726.07,3260.64 h60
  text "PTH" at 4180.92,3260.64 h60
  text "Round" at 4394.23,3260.64 h60
  text "Top Layer - Bottom Layer" at 4698.82,3260.64 h60
  text "Via" at 5263.19,3260.64 h60
  text "Rounded" at 5515,3260.64 h60
  text "v30h15m0mx0" at 5839.9,3260.64 h60
  text "-" at 7776.71,3260.64 h60
  text "-" at 8228.24,3260.64 h60
  text "2" at 3516.46,3138.27 h60
  text "0.600mm (23.62mil)" at 3726.07,3138.27 h60
  text "PTH" at 4180.92,3138.27 h60
  text "Round" at 4394.23,3138.27 h60
  text "Top Layer - Bottom Layer" at 4698.82,3138.27 h60
  text "Pad" at 5263.19,3138.27 h60
  text "(Mixed)" at 5515,3138.27 h60
  text "(Mixed)" at 5839.9,3138.27 h60
  text "-" at 7776.71,3138.27 h60
  text "-" at 8228.24,3138.27 h60
  text "2" at 3516.46,3015.91 h60
  text "0.600mm (23.62mil)" at 3726.07,3015.91 h60
  text "PTH" at 4180.92,3015.91 h60
  text "Slot" at 4394.23,3015.91 h60
  text "Top Layer - Bottom Layer" at 4698.82,3015.91 h60
  text "Pad" at 5263.19,3015.91 h60
  text "Rounded" at 5515,3015.91 h60
  text "r180_100h60_140r50m0mx0" at 5839.9,3015.91 h60
  text "1.400mm (55.12mil)" at 7776.71,3015.91 h60
  text "0.800mm (31.50mil)" at 8228.24,3015.91 h60
  text "2" at 3516.46,2893.54 h60
  text "0.600mm (23.62mil)" at 3726.07,2893.54 h60
  text "PTH" at 4180.92,2893.54 h60
  text "Slot" at 4394.23,2893.54 h60
  text "Top Layer - Bottom Layer" at 4698.82,2893.54 h60
  text "Pad" at 5263.19,2893.54 h60
  text "Rounded" at 5515,2893.54 h60
  text "r220_100h60_180r50m0mx0" at 5839.9,2893.54 h60
  text "1.800mm (70.87mil)" at 7776.71,2893.54 h60
  text "1.200mm (47.24mil)" at 8228.24,2893.54 h60
  text "2" at 3516.46,2771.18 h60
  text "0.620mm (24.41mil)" at 3726.07,2771.18 h60
  text "NPTH" at 4180.92,2771.18 h60
  text "Round" at 4394.23,2771.18 h60
  text "Top Layer - Bottom Layer" at 4698.82,2771.18 h60
  text "Pad" at 5263.19,2771.18 h60
  text "Rounded" at 5515,2771.18 h60
  text "c62hn62m42p0" at 5839.9,2771.18 h60
  text "-" at 7776.71,2771.18 h60
  text "-" at 8228.24,2771.18 h60
  text "3" at 3516.46,2648.81 h60
  text "0.300mm (11.81mil)" at 3726.07,2648.81 h60
  text "PTH" at 4180.92,2648.81 h60
  text "Round" at 4394.23,2648.81 h60
  text "Top Layer - Bottom Layer" at 4698.82,2648.81 h60
  text "Via" at 5263.19,2648.81 h60
  text "Rounded" at 5515,2648.81 h60
  text "v60h30m0mx0" at 5839.9,2648.81 h60
  text "-" at 7776.71,2648.81 h60
  text "-" at 8228.24,2648.81 h60
  text "3" at 3516.46,2526.45 h60
  text "2.200mm (86.61mil)" at 3726.07,2526.45 h60
  text "PTH" at 4180.92,2526.45 h60
  text "Round" at 4394.23,2526.45 h60
  text "Top Layer - Bottom Layer" at 4698.82,2526.45 h60
  text "Pad" at 5263.19,2526.45 h60
  text "Rounded" at 5515,2526.45 h60
  text "c550h220m0mx0" at 5839.9,2526.45 h60
  text "-" at 7776.71,2526.45 h60
  text "-" at 8228.24,2526.45 h60
  text "4" at 3516.46,2404.08 h60
  text "0.100mm (3.94mil)" at 3726.07,2404.08 h60
  text "PTH" at 4180.92,2404.08 h60
  text "Round" at 4394.23,2404.08 h60
  text "Top Layer - Bottom Layer" at 4698.82,2404.08 h60
  text "Via" at 5263.19,2404.08 h60
  text "Rounded" at 5515,2404.08 h60
  text "(Mixed)" at 5839.9,2404.08 h60
  text "-" at 7776.71,2404.08 h60
  text "-" at 8228.24,2404.08 h60
  text "4" at 3516.46,2281.72 h60
  text "0.100mm (3.94mil)" at 3726.07,2281.72 h60
  text "PTH" at 4180.92,2281.72 h60
  text "Round" at 4394.23,2281.72 h60
  text "Top Layer - Bottom Layer" at 4698.82,2281.72 h60
  text "Via" at 5263.19,2281.72 h60
  text "Rounded" at 5515,2281.72 h60
  text "(Mixed)" at 5839.9,2281.72 h60
  text "-" at 7776.71,2281.72 h60
  text "-" at 8228.24,2281.72 h60
  text "6" at 3516.46,2159.35 h60
  text "0.500mm (19.69mil)" at 3726.07,2159.35 h60
  text "PTH" at 4180.92,2159.35 h60
  text "Round" at 4394.23,2159.35 h60
  text "Top Layer - Bottom Layer" at 4698.82,2159.35 h60
  text "Pad" at 5263.19,2159.35 h60
  text "Rounded" at 5515,2159.35 h60
  text "c75h50m0mx0" at 5839.9,2159.35 h60
  text "-" at 7776.71,2159.35 h60
  text "-" at 8228.24,2159.35 h60
  text "6" at 3516.46,2036.99 h60
  text "0.991mm (39.02mil)" at 3726.07,2036.99 h60
  text "NPTH" at 4180.92,2036.99 h60
  text "Round" at 4394.23,2036.99 h60
  text "Top Layer - Bottom Layer" at 4698.82,2036.99 h60
  text "Pad" at 5263.19,2036.99 h60
  text "Rounded" at 5515,2036.99 h60
  text "c65hn99m0mx0" at 5839.9,2036.99 h60
  text "-" at 7776.71,2036.99 h60
  text "-" at 8228.24,2036.99 h60
  text "8" at 3516.46,1914.63 h60
  text "1.000mm (39.37mil)" at 3726.07,1914.63 h60
  text "PTH" at 4180.92,1914.63 h60
  text "Round" at 4394.23,1914.63 h60
  text "Top Layer - Bottom Layer" at 4698.82,1914.63 h60
  text "Pad" at 5263.19,1914.63 h60
  text "(Mixed)" at 5515,1914.63 h60
  text "(Mixed)" at 5839.9,1914.63 h60
  text "-" at 7776.71,1914.63 h60
  text "-" at 8228.24,1914.63 h60
  text "47" at 3516.46,1792.26 h60
  text "0.200mm (7.87mil)" at 3726.07,1792.26 h60
  text "PTH" at 4180.92,1792.26 h60
  text "Round" at 4394.23,1792.26 h60
  text "Top Layer - Bottom Layer" at 4698.82,1792.26 h60
  text "Via" at 5263.19,1792.26 h60
  text "Rounded" at 5515,1792.26 h60
  text "(Mixed)" at 5839.9,1792.26 h60
  text "-" at 7776.71,1792.26 h60
  text "-" at 8228.24,1792.26 h60
  text "Slot definitions :" at 3275.47,1706.61 h60
  text "Routed Path Length" at 3612.53,1706.61 h60
  text "= Calculated from tool start centre position to tool end centre position." at 4028.45,1706.61 h60
  text "Hole Length" at 3612.53,1657.66 h60
  text "= Routed Path Length + Tool Size = Slot length as defined in the PCB layout" at 3876.66,1657.66 h60

## Text inside footprints (layer, text, board x,y; h text height)
J13: Mechanical 10 "Edge of PCB" at -32.48,486.26 h31.5 r270